# EAGLE board quickdev_v2 (EAGLE 5.07)
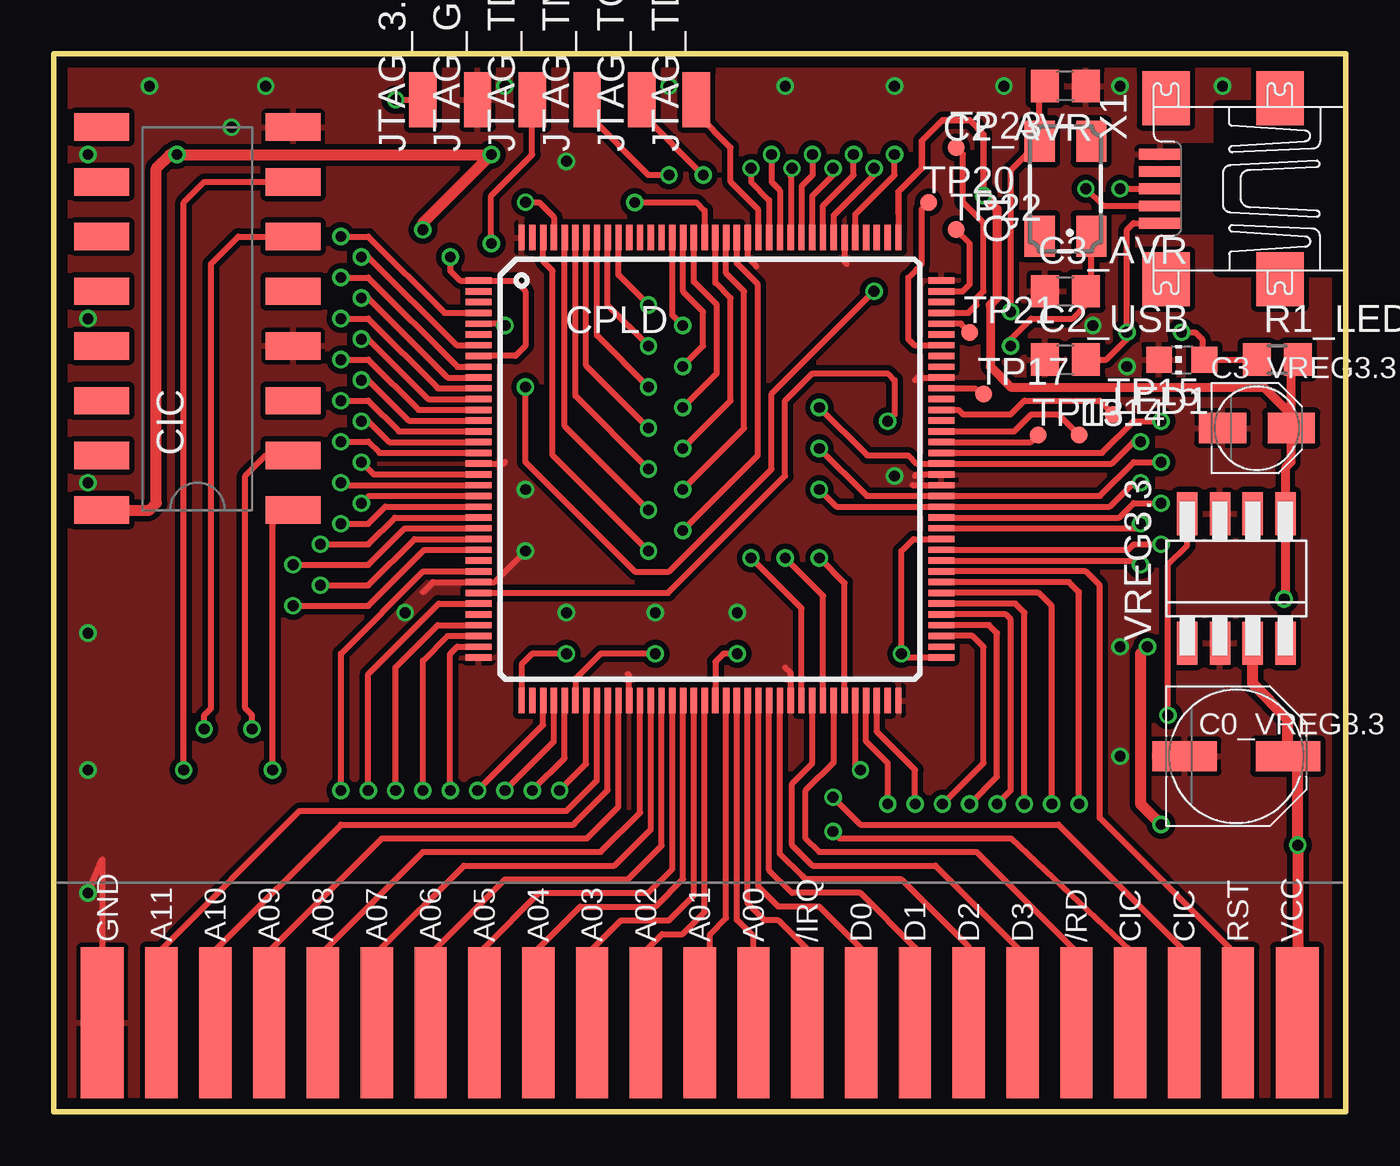
[diagram p0: board, top side]
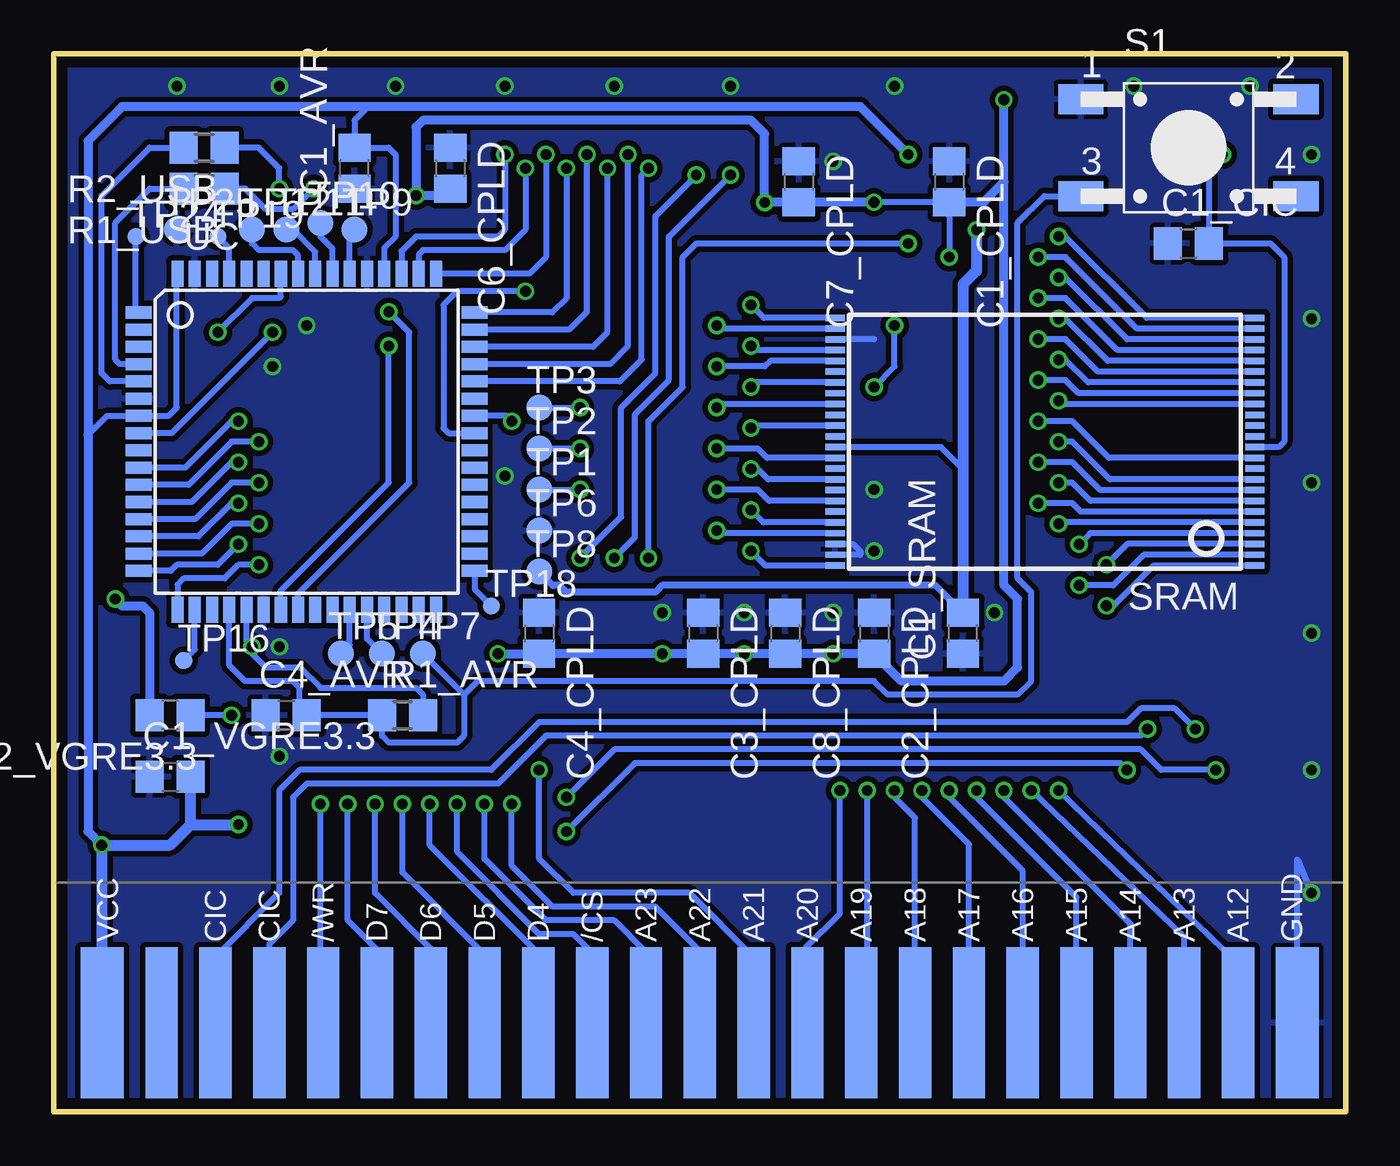
[diagram p1: board, bottom side, seen from below]

Size 60.01 x 49.12 mm. Coordinates in mm from the lower left corner, seen from the top.
Outline: 0,0 0,49.12 60.01,49.12 60.01,0 0,0
Copper layers (1*16): Top 0.035mm / dielectric 1.5mm / Bottom 0.035mm
Design rules "PCB-POOL *": minimum track width 0.2mm, minimum drill 0.3mm, track to track 0.2mm, track to pad 0.2mm, pad to pad 0.2mm, via to via 0.2mm, smd to smd 0.2mm, copper to edge 20mil, drill to drill 8mil, minimum pad ring 8mil, minimum via ring 6mil, stop-mask expansion 3mil, vias tented up to drill 99mil, thermal gap 8mil

## Footprints (pad centres in the part's own frame; a part is rotated, then mirrored left to right if it is on the bottom)
PANASONIC_D = smd 3 x 1.4: + 2.4,0; - -2.4,0
C0805 = smd 1.3 x 1.5: 1 -0.95,0; 2 0.95,0
PANASONIC_B = smd 2.2 x 1.4: + 1.6,0; - -1.6,0
IC-PACKAGE_DIL16_SMD = smd 1.27 x 2.54: 1 -8.89,-4.445; 2 -6.35,-4.445; 3 -3.81,-4.445; 4 -1.27,-4.445; 5 1.27,-4.445; 6 3.81,-4.445; 7 6.35,-4.445; 8 8.89,-4.445; 9 8.89,4.445; 10 6.35,4.445; 11 3.81,4.445; 12 1.27,4.445; 13 -1.27,4.445; 14 -3.81,4.445; 15 -6.35,4.445; 16 -8.89,4.445
TQ144 = smd 1.2 x 0.295: 1 -10.75,8.75; 2 -10.75,8.25; 3 -10.75,7.75; 4 -10.75,7.25; 5 -10.75,6.75; 6 -10.75,6.25; 7 -10.75,5.75; 8 -10.75,5.25; 9 -10.75,4.75; 10 -10.75,4.25; 11 -10.75,3.75; 12 -10.75,3.25; 13 -10.75,2.75; 14 -10.75,2.25; 15 -10.75,1.75; 16 -10.75,1.25; 17 -10.75,0.75; 18 -10.75,0.25; 19 -10.75,-0.25; 20 -10.75,-0.75; 21 -10.75,-1.25; 22 -10.75,-1.75; 23 -10.75,-2.25; 24 -10.75,-2.75; 25 -10.75,-3.25; 26 -10.75,-3.75; 27 -10.75,-4.25; 28 -10.75,-4.75; 29 -10.75,-5.25; 30 -10.75,-5.75; 31 -10.75,-6.25; 32 -10.75,-6.75; 33 -10.75,-7.25; 34 -10.75,-7.75; 35 -10.75,-8.25; 36 -10.75,-8.75; 73 10.75,-8.75; 74 10.75,-8.25; 75 10.75,-7.75; 76 10.75,-7.25; 77 10.75,-6.75; 78 10.75,-6.25; 79 10.75,-5.75; 80 10.75,-5.25; 81 10.75,-4.75; 82 10.75,-4.25; 83 10.75,-3.75; 84 10.75,-3.25; 85 10.75,-2.75; 86 10.75,-2.25; 87 10.75,-1.75; 88 10.75,-1.25; 89 10.75,-0.75; 90 10.75,-0.25; 91 10.75,0.25; 92 10.75,0.75; 93 10.75,1.25; 94 10.75,1.75; 95 10.75,2.25; 96 10.75,2.75; 97 10.75,3.25; 98 10.75,3.75; 99 10.75,4.25; 100 10.75,4.75; 101 10.75,5.25; 102 10.75,5.75; 103 10.75,6.25; 104 10.75,6.75; 105 10.75,7.25; 106 10.75,7.75; 107 10.75,8.25; 108 10.75,8.75 | smd 0.295 x 1.2: 37 -8.75,-10.75; 38 -8.25,-10.75; 39 -7.75,-10.75; 40 -7.25,-10.75; 41 -6.75,-10.75; 42 -6.25,-10.75; 43 -5.75,-10.75; 44 -5.25,-10.75; 45 -4.75,-10.75; 46 -4.25,-10.75; 47 -3.75,-10.75; 48 -3.25,-10.75; 49 -2.75,-10.75; 50 -2.25,-10.75; 51 -1.75,-10.75; 52 -1.25,-10.75; 53 -0.75,-10.75; 54 -0.25,-10.75; 55 0.25,-10.75; 56 0.75,-10.75; 57 1.25,-10.75; 58 1.75,-10.75; 59 2.25,-10.75; 60 2.75,-10.75; 61 3.25,-10.75; 62 3.75,-10.75; 63 4.25,-10.75; 64 4.75,-10.75; 65 5.25,-10.75; 66 5.75,-10.75; 67 6.25,-10.75; 68 6.75,-10.75; 69 7.25,-10.75; 70 7.75,-10.75; 71 8.25,-10.75; 72 8.75,-10.75; 109 8.75,10.75; 110 8.25,10.75; 111 7.75,10.75; 112 7.25,10.75; 113 6.75,10.75; 114 6.25,10.75; 115 5.75,10.75; 116 5.25,10.75; 117 4.75,10.75; 118 4.25,10.75; 119 3.75,10.75; 120 3.25,10.75; 121 2.75,10.75; 122 2.25,10.75; 123 1.75,10.75; 124 1.25,10.75; 125 0.75,10.75; 126 0.25,10.75; 127 -0.25,10.75; 128 -0.75,10.75; 129 -1.25,10.75; 130 -1.75,10.75; 131 -2.25,10.75; 132 -2.75,10.75; 133 -3.25,10.75; 134 -3.75,10.75; 135 -4.25,10.75; 136 -4.75,10.75; 137 -5.25,10.75; 138 -5.75,10.75; 139 -6.25,10.75; 140 -6.75,10.75; 141 -7.25,10.75; 142 -7.75,10.75; 143 -8.25,10.75; 144 -8.75,10.75
SMD1,27-2,54 = smd 1.27 x 2.54: 1 0,0
CHIP-LED0805 = smd 1.2 x 1.2: A 0,-1.05; C 0,1.05
CTS406 = smd 1.9 x 1.4: 1 -2.2,-1.2; 2 2.2,-1.2; 3 2.2,1.2; 4 -2.2,1.2
R0805 = smd 1.3 x 1.5: 1 -0.95,0; 2 0.95,0
TASTER-9314_SMD = smd 2.1 x 1.4: 1 -5,2.25; 2 5,2.25; 3 -5,-2.25; 4 5,-2.25
TSOP48 = smd 0.9 x 0.3: 1 -9.75,5.75; 2 -9.75,5.25; 3 -9.75,4.75; 4 -9.75,4.25; 5 -9.75,3.75; 6 -9.75,3.25; 7 -9.75,2.75; 8 -9.75,2.25; 9 -9.75,1.75; 10 -9.75,1.25; 11 -9.75,0.75; 12 -9.75,0.25; 13 -9.75,-0.25; 14 -9.75,-0.75; 15 -9.75,-1.25; 16 -9.75,-1.75; 17 -9.75,-2.25; 18 -9.75,-2.75; 19 -9.75,-3.25; 20 -9.75,-3.75; 21 -9.75,-4.25; 22 -9.75,-4.75; 23 -9.75,-5.25; 24 -9.75,-5.75; 25 9.75,-5.75; 26 9.75,-5.25; 27 9.75,-4.75; 28 9.75,-4.25; 29 9.75,-3.75; 30 9.75,-3.25; 31 9.75,-2.75; 32 9.75,-2.25; 33 9.75,-1.75; 34 9.75,-1.25; 35 9.75,-0.75; 36 9.75,-0.25; 37 9.75,0.25; 38 9.75,0.75; 39 9.75,1.25; 40 9.75,1.75; 41 9.75,2.25; 42 9.75,2.75; 43 9.75,3.25; 44 9.75,3.75; 45 9.75,4.25; 46 9.75,4.75; 47 9.75,5.25; 48 9.75,5.75
TP12R = smd 1.2 x 1.2: TP 0,0
TP08R = smd 0.8 x 0.8: TP 0,0
SNES_CON = smd 2 x 7: 5 2.25,3.5; 27 57.75,3.5 | smd 1.5 x 7: 6 5,3.5; 7 7.5,3.5; 8 10,3.5; 9 12.5,3.5; 10 15,3.5; 11 17.5,3.5; 12 20,3.5; 13 22.5,3.5; 14 25,3.5; 15 27.5,3.5; 16 30,3.5; 17 32.5,3.5; 18 35,3.5; 19 37.5,3.5; 20 40,3.5; 21 42.5,3.5; 22 45,3.5; 23 47.5,3.5; 24 50,3.5; 25 52.5,3.5; 26 55,3.5 | smd 2 x 7 bottom: 36 2.25,3.5; 58 57.75,3.5 | smd 1.5 x 7 bottom: 37 5,3.5; 38 7.5,3.5; 39 10,3.5; 40 12.5,3.5; 41 15,3.5; 42 17.5,3.5; 43 20,3.5; 44 22.5,3.5; 45 25,3.5; 46 27.5,3.5; 47 30,3.5; 48 32.5,3.5; 49 35,3.5; 50 37.5,3.5; 51 40,3.5; 52 42.5,3.5; 53 45,3.5; 54 47.5,3.5; 55 50,3.5; 56 52.5,3.5; 57 55,3.5
TQFP64 = smd 1.194 x 0.559: 1 -7.8,6; 2 -7.8,5.2; 3 -7.8,4.4; 4 -7.8,3.6; 5 -7.8,2.8; 6 -7.8,2; 7 -7.8,1.2; 8 -7.8,0.4; 9 -7.8,-0.4; 10 -7.8,-1.2; 11 -7.8,-2; 12 -7.8,-2.8; 13 -7.8,-3.6; 14 -7.8,-4.4; 15 -7.8,-5.2; 16 -7.8,-6; 33 7.8,-6; 34 7.8,-5.2; 35 7.8,-4.4; 36 7.8,-3.6; 37 7.8,-2.8; 38 7.8,-2; 39 7.8,-1.2; 40 7.8,-0.4; 41 7.8,0.4; 42 7.8,1.2; 43 7.8,2; 44 7.8,2.8; 45 7.8,3.6; 46 7.8,4.4; 47 7.8,5.2; 48 7.8,6 | smd 0.559 x 1.194: 17 -6,-7.8; 18 -5.2,-7.8; 19 -4.4,-7.8; 20 -3.6,-7.8; 21 -2.8,-7.8; 22 -2,-7.8; 23 -1.2,-7.8; 24 -0.4,-7.8; 25 0.4,-7.8; 26 1.2,-7.8; 27 2,-7.8; 28 2.8,-7.8; 29 3.6,-7.8; 30 4.4,-7.8; 31 5.2,-7.8; 32 6,-7.8; 49 6,7.8; 50 5.2,7.8; 51 4.4,7.8; 52 3.6,7.8; 53 2.8,7.8; 54 2,7.8; 55 1.2,7.8; 56 0.4,7.8; 57 -0.4,7.8; 58 -1.2,7.8; 59 -2,7.8; 60 -2.8,7.8; 61 -3.6,7.8; 62 -4.4,7.8; 63 -5.2,7.8; 64 -6,7.8
SM8 = smd 0.95 x 2: 1 -2.28,-3; 2 -0.76,-3; 3 0.76,-3; 4 2.28,-3; 5 2.28,3; 6 0.76,3; 7 -0.76,3; 8 -2.28,3
UX60A-MB-5ST = smd 2 x 0.5: 1 2.25,1.6; 2 2.25,0.8; 3 2.25,0; 4 2.25,-0.8; 5 2.25,-1.6 | smd 2.2 x 2.5: M1 -3.3,-4.2; M2 -3.3,4.2; M3 2,4.2; M4 2,-4.2

## Placement (x,y rotation side)
C0_VREG3.3  VF 100/16 K-D  [PANASONIC_D]  54.93,16.51 0 top
C1_AVR  X7R-G0805 10N  [C0805]  46.04,43.81 90 bottom
C1_CIC  X7R-G0805 10N  [C0805]  7.3,40.32 0 bottom
C1_CPLD  X7R-G0805 10N  [C0805]  18.41,43.18 270 bottom
C1_SRAM  X7R-G0805 10N  [C0805]  17.78,22.23 90 bottom
C1_VGRE3.3  X7R-G0805 100N  [C0805]  54.61,15.56 0 bottom
C2_AVR  NPO-G0805 15P  [C0805]  46.99,47.62 180 top
C2_CPLD  X7R-G0805 10N  [C0805]  21.91,22.23 270 bottom
C2_USB  X5R-G0805 10/16  [C0805]  46.99,34.92 0 top
C2_VGRE3.3  NPO-G0805 10P  [C0805]  54.61,18.41 180 bottom
C3_AVR  NPO-G0805 15P  [C0805]  46.99,38.1 0 top
C3_CPLD  X7R-G0805 10N  [C0805]  29.84,22.23 270 bottom
C3_VREG3.3  VF 1,0/50 C-B  [PANASONIC_B]  55.88,31.75 0 top
C4_AVR  X7R-G0805 47N  [C0805]  49.21,18.41 0 bottom
C4_CPLD  X7R-G0805 10N  [C0805]  37.47,22.23 270 bottom
C6_CPLD  X7R-G0805 10N  [C0805]  41.59,43.81 270 bottom
C7_CPLD  X7R-G0805 10N  [C0805]  25.4,43.18 270 bottom
C8_CPLD  X7R-G0805 10N  [C0805]  26.04,22.23 270 bottom
CIC  DIL16_SMD  [IC-PACKAGE_DIL16_SMD]  6.67,36.83 90 top
CPLD  XC95144XL  [TQ144]  30.48,29.84 0 top
JTAG_3.3  [SMD1,27-2,54]  17.14,46.99 0 top
JTAG_GND  [SMD1,27-2,54]  19.68,46.99 0 top
JTAG_TCK  [SMD1,27-2,54]  27.3,46.99 0 top
JTAG_TDI  [SMD1,27-2,54]  22.23,46.99 0 top
JTAG_TDO  [SMD1,27-2,54]  29.84,46.99 0 top
JTAG_TMS  [SMD1,27-2,54]  24.77,46.99 0 top
LED1  [CHIP-LED0805]  52.39,34.92 90 top
Q1  16,000000-MJ  [CTS406]  46.99,42.86 90 top
R1_AVR  22  [R0805]  43.81,18.41 0 bottom
R1_LED  1k6  [R0805]  56.83,34.92 0 top
R1_USB  22  [R0805]  53.02,42.86 180 bottom
R2_USB  22  [R0805]  53.02,44.77 180 bottom
S1  [TASTER-9314_SMD]  7.3,44.77 0 bottom
SRAM  CY62167E  [TSOP48]  13.97,31.11 180 bottom
TP1  PTR1TP12R  [TP12R]  37.47,28.89 0 bottom
TP2  PTR1TP12R  [TP12R]  37.47,30.8 0 bottom
TP3  PTR1TP12R  [TP12R]  37.47,32.7 0 bottom
TP4  PTR1TP12R  [TP12R]  44.77,21.27 0 bottom
TP5  PTR1TP12R  [TP12R]  46.67,21.27 0 bottom
TP6  PTR1TP12R  [TP12R]  37.47,26.99 0 bottom
TP7  PTR1TP12R  [TP12R]  42.86,21.27 0 bottom
TP8  PTR1TP12R  [TP12R]  37.47,25.08 0 bottom
TP9  PTR1TP12R  [TP12R]  46.04,40.96 0 bottom
TP10  PTR1TP12R  [TP12R]  47.62,41.27 0 bottom
TP11  PTR1TP12R  [TP12R]  49.21,40.96 0 bottom
TP12  PTR1TP12R  [TP12R]  50.8,40.96 0 bottom
TP13  PTR1TP08R  [TP08R]  45.72,31.43 0 top
TP14  PTR1TP08R  [TP08R]  47.62,31.43 0 top
TP15  PTR1TP08R  [TP08R]  49.21,32.38 0 top
TP16  PTR1TP08R  [TP08R]  53.98,20.95 0 bottom
TP17  PTR1TP08R  [TP08R]  43.18,33.34 0 top
TP18  PTR1TP08R  [TP08R]  39.69,23.5 0 bottom
TP19  PTR1TP08R  [TP08R]  52.39,40.64 0 bottom
TP20  PTR1TP08R  [TP08R]  40.64,42.23 0 top
TP21  PTR1TP08R  [TP08R]  42.55,36.2 0 top
TP22  PTR1TP08R  [TP08R]  41.91,40.96 0 top
TP23  PTR1TP08R  [TP08R]  41.91,44.77 0 top
TP24  PTR1TP08R  [TP08R]  56.2,40.64 0 bottom
TP25  PTR1TP12R  [TP12R]  54.29,40.96 0 bottom
U$2  SNES_CON_FRONT  [SNES_CON]  0,0.64 0 top
UC  AT90USB1287-AU  [TQFP64]  48.26,31.11 0 bottom
VREG3.3  ZLDO 330 T8TA  [SM8]  54.93,24.77 0 top
X1  MINI-USB-UX60A-MB-5ST  [UX60A-MB-5ST]  53.66,42.86 180 top

## Library data of the parts
C0_VREG3.3 C1_AVR C1_CIC C1_CPLD C1_SRAM C1_VGRE3.3 C2_AVR C2_CPLD C2_USB C2_VGRE3.3 C3_AVR C3_CPLD C3_VREG3.3 C4_AVR C4_CPLD C6_CPLD C7_CPLD C8_CPLD R1_AVR R1_LED R1_USB R2_USB = rcl
CIC = snesram
CPLD = quickdev_v2
JTAG_3.3 JTAG_GND JTAG_TCK JTAG_TDI JTAG_TDO JTAG_TMS = wirepad
LED1 = led
Q1 = crystal
S1 = Ergaenzung
SRAM = cy62167
TP1-TP25 = testpad
U$2 = snes_con
UC = at90usb
VREG3.3 = 1_USER
X1 = con-hirose

## Nets
/CE1: CPLD.130 SRAM.26
/CS: CPLD.75 U$2.49
/IRQ: CPLD.58 U$2.18
/OE: CPLD.136 SRAM.28
/RD: CPLD.66 U$2.23
/WE: CPLD.16 SRAM.11
/WR: CPLD.80 U$2.54
A00: CPLD.57 U$2.17
A01: CPLD.56 U$2.16
A02: CPLD.54 U$2.15
A03: CPLD.53 U$2.14
A04: CPLD.52 U$2.13
A05: CPLD.51 U$2.12
A06: CPLD.50 U$2.11
A07: CPLD.49 U$2.10
A08: CPLD.48 U$2.9
A09: CPLD.46 U$2.8
A10: CPLD.45 U$2.7
A11: CPLD.44 U$2.6
A12: CPLD.28 U$2.37
A13: CPLD.31 U$2.38
A14: CPLD.33 U$2.39
A15: CPLD.34 U$2.40
A16: CPLD.35 U$2.41
A17: CPLD.39 U$2.42
A18: CPLD.40 U$2.43
A19: CPLD.41 U$2.44
A20: CPLD.43 U$2.45
A21: CPLD.68 U$2.46
A22: CPLD.69 U$2.47
A23: CPLD.70 U$2.48
AVR0: CPLD.92 UC.10
AVR1: CPLD.91 TP3.TP UC.11
AVR2: CPLD.88 TP2.TP UC.12
AVR3: CPLD.87 TP1.TP UC.13
AVR4: CPLD.86 UC.14
AVR5: CPLD.85 UC.15
AVR6: CPLD.83 UC.16
AVR7: CPLD.82 UC.17
AVR8: CPLD.113 UC.51
AVR9: CPLD.115 UC.50
AVR10: CPLD.116 UC.49
AVR11: CPLD.117 UC.48
AVR12: CPLD.118 UC.47
AVR13: CPLD.119 UC.46
AVR14: CPLD.120 UC.45
AVR15: CPLD.121 UC.44
CICIN6: CIC.6 U$2.56
CICIN7: CIC.7 U$2.25
CICOUT1: CIC.1 U$2.24
CICOUT2: CIC.2 U$2.55
CLK: CPLD.30 UC.42
D0: CPLD.59 U$2.19
D1: CPLD.60 U$2.20
D2: CPLD.61 U$2.21
D3: CPLD.64 U$2.22
D4: CPLD.76 U$2.50
D5: CPLD.77 U$2.51
D6: CPLD.78 U$2.52
D7: CPLD.79 U$2.53
GND: C0_VREG3.3.- C1_AVR.1 C1_CIC.1 C1_CPLD.1 C1_SRAM.1 C1_VGRE3.3.1 C2_AVR.1 C2_CPLD.1 C2_USB.1 C3_AVR.1 C3_CPLD.1 C3_VREG3.3.- C4_AVR.1 C4_CPLD.1 C6_CPLD.1 C7_CPLD.1 C8_CPLD.1 CIC.4 CIC.8 CPLD.18 CPLD.29 CPLD.36 CPLD.47 CPLD.62 CPLD.72 CPLD.89 CPLD.90 CPLD.99 CPLD.108 CPLD.114 CPLD.123 CPLD.144 JTAG_GND.1 LED1.C S1.1 SRAM.27 SRAM.46 SRAM.47 TP6.TP TP25.TP U$2.5 U$2.36 UC.6 UC.22 UC.53 UC.63 VREG3.3.2 VREG3.3.7 X1.5
IO0: CPLD.129 SRAM.29
IO1: CPLD.137 SRAM.31
IO2: CPLD.128 SRAM.33
IO3: CPLD.138 SRAM.35
IO4: CPLD.126 SRAM.38
IO5: CPLD.139 SRAM.40
IO6: CPLD.125 SRAM.42
IO7: CPLD.140 SRAM.44
N$1: R1_USB.1 X1.2
N$2: C2_VGRE3.3.1 VREG3.3.8
N$3: CPLD.122 JTAG_TDO.1
N$4: CPLD.63 JTAG_TDI.1
N$5: CPLD.65 JTAG_TMS.1
N$6: CPLD.67 JTAG_TCK.1
N$7: C3_AVR.2 Q1.1 UC.23
N$8: C2_USB.2 UC.8 X1.1
N$9: C2_AVR.2 Q1.3 UC.24
N$10: R2_USB.1 X1.3
N$11: R2_USB.2 UC.5
N$12: R1_USB.2 UC.4
N$13: C4_AVR.2 R1_AVR.1 S1.3 TP7.TP UC.20
N$14: TP4.TP UC.28
N$15: TP5.TP UC.27
N$16: LED1.A R1_LED.1 UC.58
N$17: TP9.TP UC.54
N$18: TP10.TP UC.55
N$19: TP11.TP UC.56
N$20: TP12.TP UC.57
N$21: TP16.TP UC.18
N$22: TP18.TP UC.33
N$23: CPLD.98 TP17.TP
N$24: TP19.TP UC.61
N$25: CPLD.96 TP15.TP
N$26: CPLD.94 TP14.TP
N$27: CPLD.93 TP13.TP
N$28: CPLD.105 TP23.TP
N$29: CPLD.107 TP22.TP
N$30: CPLD.104 TP21.TP
N$31: CPLD.102 TP20.TP
N$32: TP24.TP UC.1
RST: CPLD.81 U$2.26
SA0: CPLD.135 SRAM.25
SA1: CPLD.4 SRAM.24
SA2: CPLD.7 SRAM.23
SA3: CPLD.9 SRAM.22
SA4: CPLD.10 SRAM.21
SA5: CPLD.11 SRAM.20
SA6: CPLD.12 SRAM.19
SA7: CPLD.13 SRAM.18
SA8: CPLD.19 SRAM.8
SA9: CPLD.20 SRAM.7
SA10: CPLD.21 SRAM.6
SA11: CPLD.22 SRAM.5
SA12: CPLD.23 SRAM.4
SA13: CPLD.24 SRAM.3
SA14: CPLD.25 SRAM.2
SA15: CPLD.26 SRAM.1
SA16: CPLD.142 SRAM.48
SA17: CPLD.14 SRAM.17
SA18: CPLD.15 SRAM.16
SA19: CPLD.17 SRAM.9
SA20: CPLD.124 SRAM.45
TRISTATE: CPLD.5 UC.41
UVCC: UC.3
VCC: C0_VREG3.3.+ C1_AVR.2 C1_CIC.2 C1_SRAM.2 C1_VGRE3.3.2 CIC.16 R1_AVR.2 SRAM.12 SRAM.37 TP8.TP U$2.27 U$2.58 UC.7 UC.21 UC.52 UC.64 VREG3.3.3
VCCINT: C1_CPLD.2 C2_CPLD.2 C2_VGRE3.3.2 C3_CPLD.2 C3_VREG3.3.+ C4_CPLD.2 C6_CPLD.2 C7_CPLD.2 C8_CPLD.2 CPLD.1 CPLD.8 CPLD.37 CPLD.42 CPLD.55 CPLD.73 CPLD.84 CPLD.109 CPLD.127 CPLD.141 JTAG_3.3.1 R1_LED.2 VREG3.3.5

## Tracks (layer width: path | path; a pad name or v marks a point on that pad's centre or on a via)
/CE1  (via drill 0.5)
  Top 0.279: CPLD.130 28.73,36.99 v29.21,36.51
  Bottom 0.279: SRAM.26 29.06,36.37 v29.21,36.51
/CS  (via drill 0.5)
  Top 0.279: CPLD.75 42.67,22.09 43.18,21.59 43.18,16.19 v41.27,14.29
  Bottom 0.279: U$2.49 35,7.38 35.88,8.26 37.47,8.26 41.27,12.06 v41.27,14.29
/IRQ
  Top 0.279: CPLD.58 32.23,9.68 33.02,8.89 33.66,8.89 35,7.54 U$2.18
/OE  (via drill 0.5)
  Top 0.279: CPLD.136 25.73,37.45 v27.62,35.56
  Bottom 0.279: SRAM.28 27.43,35.37 v27.62,35.56
/RD
  Top 0.279: CPLD.66 36.23,16.23 34.92,14.92 34.92,12.7 35.56,12.06 42.86,12.06 47.5,7.43 U$2.23
/WE  (via drill 0.5)
  Top 0.279: CPLD.16 15.58,31.09 14.61,32.07 v14.29,32.07
  Bottom 0.279: SRAM.11 11,30.36 12.7,32.07 v14.29,32.07
/WR  (via drill 0.5)
  Top 0.279: CPLD.80 47.16,24.59 47.62,24.13 v47.62,14.29
  Bottom 0.279: U$2.54 47.62,4.26 v47.62,14.29
A00
  Top 0.279: U$2.17 32.5,8.14 31.73,8.91 CPLD.57
A01
  Top 0.279: CPLD.56 31.23,9.01 30.48,8.26 30.48,4.62 U$2.16
A02
  Top 0.279: CPLD.54 30.23,9.28 29.21,8.26 28.26,8.26 27.5,7.5 U$2.15
A03
  Top 0.279: CPLD.53 29.73,10.04 28.57,8.89 26.35,8.89 25,7.54 U$2.14
A04
  Top 0.279: CPLD.52 29.23,10.81 27.94,9.53 24.45,9.53 22.5,7.58 U$2.13
A05
  Top 0.279: CPLD.51 28.73,11.27 27.62,10.16 22.54,10.16 20,7.62 U$2.12
A06
  Top 0.279: CPLD.50 28.23,12.36 26.67,10.79 20.95,10.79 17.5,7.34 U$2.11
A07
  Top 0.279: CPLD.49 27.73,13.12 26.04,11.43 19.05,11.43 15,7.38 U$2.10
A08
  Top 0.279: CPLD.48 27.23,13.89 25.4,12.06 17.14,12.06 12.5,7.42 U$2.9
A09
  Top 0.279: CPLD.46 26.23,14.16 24.77,12.7 15.24,12.7 10,7.46 U$2.8
A10
  Top 0.279: CPLD.45 25.73,14.94 24.29,13.49 24.13,13.34 13.34,13.34 7.5,7.5 U$2.7
A11
  Top 0.279: CPLD.44 25.23,15.39 23.81,13.97 11.43,13.97 5,7.54 U$2.6
A12  (via drill 0.5)
  Top 0.279: v13.34,14.92 13.34,21.27 17.16,25.09 CPLD.28
  Bottom 0.279: U$2.37 5,6.91 v13.34,14.92
A13  (via drill 0.5)
  Top 0.279: v14.61,14.92 14.61,20.32 17.88,23.59 CPLD.31
  Bottom 0.279: U$2.38 7.5,8.13 v14.61,14.92
A14  (via drill 0.5)
  Top 0.279: v15.88,14.92 15.88,20.64 17.83,22.59 CPLD.33
  Bottom 0.279: U$2.39 10,8.73 15.88,14.61 v15.88,14.92
A15  (via drill 0.5)
  Top 0.279: v17.14,14.92 17.14,20.95 18.29,22.09 CPLD.34
  Bottom 0.279: U$2.40 12.5,9.96 17.14,14.61 v17.14,14.92
A16  (via drill 0.5)
  Top 0.279: CPLD.35 18.74,21.59 18.41,21.27 v18.41,14.92
  Bottom 0.279: U$2.41 15,11.19 18.41,14.61 v18.41,14.92
A17  (via drill 0.5)
  Top 0.279: CPLD.39 22.73,17.97 v19.68,14.92
  Bottom 0.279: U$2.42 17.5,12.42 19.68,14.61 v19.68,14.92
A18  (via drill 0.5)
  Top 0.279: CPLD.40 23.23,17.2 v20.95,14.92
  Bottom 0.279: 20.32,4.46 U$2.43 20,13.65 20.95,14.61 v20.95,14.92
A19  (via drill 0.5)
  Top 0.279: CPLD.41 23.73,16.43 v22.23,14.92
  Bottom 0.279: U$2.44 22.86,4.5 22.23,5.13 v22.23,14.92
A20  (via drill 0.5)
  Top 0.279: CPLD.43 24.73,16.16 v23.5,14.92
  Bottom 0.279: v23.5,14.92 23.5,9.21 25.08,7.62 25.08,4.22 U$2.45
A21  (via drill 0.5)
  Top 0.279: v37.47,15.88 37.23,16.11 CPLD.68
  Bottom 0.279: U$2.46 27.5,7.18 30.48,10.16 35.88,10.16 37.47,11.75 v37.47,15.88
A22  (via drill 0.5)
  Top 0.279: v38.73,14.29 38.73,16.19 37.73,17.2 CPLD.69
  Bottom 0.279: U$2.47 30,7.46 32.07,9.53 36.83,9.53 38.73,11.43 v38.73,14.29
A23  (via drill 0.5)
  Top 0.279: CPLD.70 38.23,17.65 40.01,15.88 v40.01,14.29
  Bottom 0.279: U$2.48 32.5,7.42 33.97,8.89 37.15,8.89 40.01,11.75 v40.01,14.29
AVR0  (via drill 0.5)
  Top 0.279: CPLD.92 48.69,30.59 50.16,32.07 v51.44,32.07
  Bottom 0.279: UC.10 53.91,29.91 51.75,32.07 v51.44,32.07
AVR1  (via drill 0.5)
  Top 0.279: v50.48,31.11 50.16,31.11 49.15,30.09 CPLD.91 40.07,30.09 39.69,30.48 37.78,30.48 v35.56,32.7
  Bottom 0.279: UC.11 53.75,29.11 51.75,31.11 v50.48,31.11 | TP3.TP v35.56,32.7
AVR2  (via drill 0.5)
  Top 0.279: v51.44,30.16 50.16,30.16 48.6,28.59 CPLD.88 37.76,28.59 v35.56,30.8
  Bottom 0.279: UC.12 53.6,28.32 51.75,30.16 v51.44,30.16 | v35.56,30.8 TP2.TP
AVR3  (via drill 0.5)
  Top 0.279: v50.48,29.21 50.16,29.21 49.05,28.09 CPLD.87 36.36,28.09 v35.56,28.89
  Bottom 0.279: UC.13 53.45,27.52 51.75,29.21 v50.48,29.21 | TP1.TP v35.56,28.89
AVR4  (via drill 0.5)
  Top 0.279: CPLD.86 49.5,27.59 50.16,28.26 v51.44,28.26
  Bottom 0.279: UC.14 53.3,26.71 51.75,28.26 v51.44,28.26
AVR5  (via drill 0.5)
  Top 0.279: CPLD.85 50.27,27.09 v50.48,27.3
  Bottom 0.279: UC.15 53.14,25.91 51.75,27.3 v50.48,27.3
AVR6  (via drill 0.5)
  Top 0.279: CPLD.83 49.91,26.09 50.16,26.35 v51.44,26.35
  Bottom 0.279: UC.16 54.58,25.11 54.29,25.4 52.39,25.4 v51.44,26.35
AVR7  (via drill 0.5)
  Top 0.279: CPLD.82 50.29,25.59 arc-90 v50.48,25.4
  Bottom 0.279: UC.17 54.26,24.48 53.98,24.77 52.07,24.77 51.44,25.4 v50.48,25.4
AVR8  (via drill 0.5)
  Top 0.279: CPLD.113 37.23,41.67 39.05,43.5 v39.05,44.45
  Bottom 0.279: UC.51 43.86,39.96 43.18,40.64 39.37,40.64 39.05,40.96 v39.05,44.45
AVR9  (via drill 0.5)
  Top 0.279: CPLD.115 36.23,41.63
  Top 0.305: 36.23,41.63 38.1,43.5 v38.1,43.81
  Bottom 0.279: UC.50 43.06,39.81 42.86,40.01 39.05,40.01 38.1,40.96 v38.1,43.81
AVR10  (via drill 0.5)
  Top 0.279: CPLD.116 35.73,42.08 37.15,43.5 v37.15,44.45
  Bottom 0.279: UC.49 37.92,38.91 37.15,39.69 v37.15,44.45
AVR11  (via drill 0.5)
  Top 0.279: CPLD.117 35.23,42.53 36.2,43.5 v36.2,43.81
  Bottom 0.279: UC.48 36.86,37.12 36.2,37.78 v36.2,43.81
AVR12  (via drill 0.5)
  Top 0.279: CPLD.118 34.73,42.98 35.24,43.5 v35.24,44.45
  Bottom 0.279: UC.47 36.08,36.31 35.24,37.15 v35.24,44.45
AVR13  (via drill 0.5)
  Top 0.279: CPLD.119 34.23,43.44 v34.29,43.81
  Bottom 0.279: UC.46 34.97,35.52 34.29,36.2 v34.29,43.81
AVR14  (via drill 0.5)
  Top 0.279: CPLD.120 33.73,42.79 33.34,43.18 v33.34,44.45
  Bottom 0.279: UC.45 34.18,34.72 33.34,35.56 v33.34,44.45
AVR15  (via drill 0.5)
  Top 0.279: CPLD.121 33.23,42.34 32.38,43.18 v32.38,43.81
  Bottom 0.279: UC.44 33.71,33.91 32.7,34.92 32.7,43.5 v32.38,43.81
CICIN6  (via drill 0.5)
  Top 0.279: v6.99,17.78 6.99,18.41 7.3,18.73 7.3,39.37 8.57,40.64 CIC.6
  Bottom 0.279: U$2.56 52.5,7.19 49.53,10.16 49.53,14.92 48.58,15.88 39.69,15.88 37.47,18.1 10.16,18.1 9.53,18.73 7.94,18.73 v6.99,17.78
CICIN7  (via drill 0.5)
  Top 0.279: v36.2,14.61 37.47,13.34 46.67,13.34 52.5,7.51 U$2.25 | v6.03,15.88 6.03,42.23 6.99,43.18 CIC.7
  Bottom 0.279: v36.2,14.61 33.97,16.83 9.53,16.83 8.57,15.88 v6.03,15.88
CICOUT1  (via drill 0.5)
  Top 0.279: v10.16,15.88 10.16,27.3 10.79,27.94 CIC.1 | U$2.24 50,7.47 44.45,12.7 36.51,12.7 v36.2,13.02
  Bottom 0.279: v36.2,13.02 33.02,16.19 10.48,16.19 v10.16,15.88
CICOUT2  (via drill 0.5)
  Top 0.279: v9.21,17.78 9.21,18.41 8.89,18.73 8.89,29.53 9.84,30.48 CIC.2
  Bottom 0.279: U$2.55 50,7.79 48.9,8.89 48.9,14.61 48.26,15.24 39.37,15.24 37.15,17.46 9.53,17.46 v9.21,17.78
CLK  (via drill 0.5)
  Top 0.279: CPLD.30 28.54,24.09 33.97,29.53 33.97,33.02 35.24,34.29 38.73,34.29 39.05,33.97 39.05,32.38 v38.73,32.07
  Bottom 0.279: v38.73,32.07 38.98,32.31 UC.42
D0
  Top 0.279: CPLD.59 32.73,10.45 33.66,9.53 35.56,9.53 37.5,7.58 U$2.19
D1
  Top 0.279: CPLD.60 33.23,11.22 34.29,10.16 37.47,10.16 40,7.62 U$2.20
D2
  Top 0.279: CPLD.61 33.73,11.99 34.77,10.95 34.92,10.79 39.37,10.79 42.5,7.67 U$2.21
D3
  Top 0.279: CPLD.64 35.23,16.18 34.29,15.24 34.29,12.38 35.24,11.43 40.96,11.43 45,7.39 U$2.22
D4  (via drill 0.5)
  Top 0.279: CPLD.76 43.45,22.59 43.81,22.23 43.81,15.56 v42.55,14.29
  Bottom 0.279: U$2.50 37.5,7.34 42.55,12.38 v42.55,14.29
D5  (via drill 0.5)
  Top 0.279: CPLD.77 44.22,23.09 44.45,22.86 44.45,14.92 v43.81,14.29
  Bottom 0.279: U$2.51 40,7.3 43.81,11.11 v43.81,14.29
D6  (via drill 0.5)
  Top 0.279: CPLD.78 44.67,23.59 45.09,23.18 v45.09,14.29
  Bottom 0.279: U$2.52 42.5,7.58 45.09,10.16 v45.09,14.29
D7  (via drill 0.5)
  Top 0.279: CPLD.79 45.76,24.09 46.35,23.5 v46.35,14.29
  Bottom 0.279: U$2.53 45,7.54 46.35,8.89 v46.35,14.29
GND  (via drill 0.5)
  Top 0.279: U$2.36 2.25,11.72 v1.59,10.16 | 39.89,29.09 CPLD.89 | CPLD.90 40.07,29.59 40.01,29.53 | CPLD.18 20.89,30.09 20.95,30.16 | v21.91,26.04 20.47,24.59 CPLD.29 17.61,24.59 17.14,24.13 | CPLD.47 26.73,20.26 26.67,20.32 | CPLD.62 34.23,20.38 33.97,20.64 | CPLD.114 36.73,39.47 36.83,39.37 | CPLD.99 40.13,34.09 40.01,33.97 | CPLD.123 32.23,39.66 32.64,39.25
  Bottom 0.279: v1.59,10.16 2.25,11.72 U$2.36 | SRAM.47 22.54,25.86 22.54,26.04 22.86,26.35 23.81,26.35 | SRAM.27 21.92,35.87 21.91,35.88
  other vias: 49.53,47.62 54.29,47.62 44.13,47.62 39.05,47.62 33.97,47.62 28.57,47.62 20.95,47.62 9.84,47.62 4.45,47.62 1.59,15.88 1.59,22.23 1.59,29.21 1.59,36.83 1.59,44.45 21.91,28.89 23.81,23.18 27.94,23.18 31.75,23.18 39.05,29.53 23.81,44.13 16.32,23.18 8.26,45.72 49.53,21.59 49.53,16.51 48.26,36.51 49.85,34.61
  pour Top (isolate 0.254): 0,0 0,49.12 60.33,49.12 60.33,0
  pour Bottom (isolate 0.254): 0,0 -0.32,49.12 60.01,49.12 60.01,0
IO0  (via drill 0.5)
  Top 0.279: CPLD.129 29.23,38.08 30.16,37.15 30.16,35.56 v29.21,34.61
  Bottom 0.279: SRAM.29 26.73,34.87 26.99,34.61 v29.21,34.61
IO1  (via drill 0.5)
  Top 0.279: CPLD.137 25.23,36.05 v27.62,33.66
  Bottom 0.279: SRAM.31 27.41,33.87 v27.62,33.66
IO2  (via drill 0.5)
  Top 0.279: CPLD.128 29.73,38.53 30.8,37.47 30.8,34.29 v29.21,32.7
  Bottom 0.279: SRAM.33 29.05,32.87 v29.21,32.7
IO3  (via drill 0.5)
  Top 0.279: CPLD.138 24.73,34.64 v27.62,31.75
  Bottom 0.279: SRAM.35 27.51,31.86 v27.62,31.75
IO4  (via drill 0.5)
  Top 0.279: CPLD.126 30.73,38.48 31.43,37.78 31.43,33.02 v29.21,30.8
  Bottom 0.279: SRAM.38 26.87,30.36 27.3,30.8 v29.21,30.8
IO5  (via drill 0.5)
  Top 0.279: CPLD.139 24.23,33.24 v27.62,29.84
  Bottom 0.279: SRAM.40 26.82,29.36 27.3,29.84 v27.62,29.84
IO6  (via drill 0.5)
  Top 0.279: CPLD.125 31.23,38.94 32.07,38.1 32.07,31.75 v29.21,28.89
  Bottom 0.279: SRAM.42 26.78,28.36 27.3,28.89 v29.21,28.89
IO7  (via drill 0.5)
  Top 0.279: CPLD.140 23.73,31.83 v27.62,27.94
  Bottom 0.279: SRAM.44 27.05,27.36 v27.62,27.94
N$1  (via drill 0.5)
  Top 0.279: X1.2 48.74,42.06 v47.94,42.86
  Bottom 0.279: v47.94,42.86 48.9,41.91 50.16,41.91 51.12,42.86 R1_USB.1
N$2  (via drill 0.5)
  Top 0.279: VREG3.3.8 52.65,26.3 51.75,25.4 v51.75,18.41
  Bottom 0.279: v51.75,18.41 C2_VGRE3.3.1
N$3
  Top 0.279: CPLD.122 32.73,41.88 31.43,43.18 31.43,44.77 29.84,46.35 JTAG_TDO.1
N$4  (via drill 0.5)
  Top 0.279: CPLD.63 34.73,23.37 v32.38,25.72 | v20.32,40.32 20.32,42.55 22.23,44.45 JTAG_TDI.1
  Bottom 0.279: v32.38,25.72 32.38,32.07 30.8,33.66 30.8,39.69 30.16,40.32 v20.32,40.32
N$5  (via drill 0.5)
  Top 0.279: CPLD.65 35.73,23.96 v33.97,25.72 | JTAG_TMS.1 24.77,46.35 27.62,43.5 v28.57,43.5
  Bottom 0.279: v33.97,25.72 33.02,26.67 33.02,32.38 31.43,33.97 31.43,40.64 v28.57,43.5
N$6  (via drill 0.5)
  Top 0.279: CPLD.67 36.73,24.55 v35.56,25.72 | v30.16,43.5 27.3,46.35 JTAG_TCK.1
  Bottom 0.279: v35.56,25.72 33.66,27.62 33.66,32.7 32.07,34.29 32.07,41.59 v30.16,43.5
N$7  (via drill 0.5)
  Top 0.279: Q1.1 48.19,38.35 C3_AVR.2 47.94,37.47 47.3,36.83 45.4,36.83 44.45,35.88 v44.45,35.56
  Bottom 0.279: UC.23 49.46,24.2 44.45,29.21 v44.45,35.56
N$8  (via drill 0.5)
  Top 0.279: C2_USB.2 48.9,34.92 49.85,35.88 v49.85,36.2 49.85,40.96 50.15,41.26 X1.1
  Bottom 0.279: UC.8 54.53,31.52 v49.85,36.2
N$9  (via drill 0.5)
  Top 0.279: C2_AVR.2 45.79,47.38 Q1.3 44.45,43.72 v44.45,37.15
  Bottom 0.279: UC.24 48.66,24.05 43.5,29.21 43.5,36.2 v44.45,37.15
N$10  (via drill 0.5)
  Top 0.279: v49.53,42.86 X1.3
  Bottom 0.279: v49.53,42.86 49.53,43.81 50.48,44.77 R2_USB.1
N$11
  Bottom 0.279: UC.5 57.41,33.91 57.78,34.29 57.78,42.54 55.56,44.77 R2_USB.2
N$12
  Bottom 0.279: UC.4 56.94,34.72 57.15,34.92 57.15,41.27 55.56,42.86 R1_USB.2
N$13
  Bottom 0.279: UC.20 51.86,20.75 51.12,20 48.9,20 48.58,19.68 48.58,18.73 C4_AVR.2 R1_AVR.1 44.77,17.46 44.45,17.14 41.27,17.14 40.96,17.46 40.96,19.37 | 40.96,19.37 TP7.TP | S1.3 14,42.52 15.24,41.27 15.24,24.77 14.61,24.13 14.61,20 15.24,19.37 21.27,19.37 21.91,20 40.32,20 40.96,19.37
N$14
  Bottom 0.279: TP4.TP 45.46,21.96 UC.28
N$15
  Bottom 0.279: TP5.TP 46.26,21.68 UC.27
N$16  (via drill 0.5)
  Top 0.279: R1_LED.1 LED1.A 53.34,35.02 53.34,35.88 53.02,36.2 v52.39,36.2
  Bottom 0.279: UC.58 49.46,37.85 49.53,37.78 50.8,37.78 v52.39,36.2
N$17
  Bottom 0.279: UC.54 46.26,41.05 TP9.TP
N$18
  Bottom 0.279: UC.55 47.06,40.08 47.62,40.64 TP10.TP
N$19
  Bottom 0.279: UC.56 47.86,39.92 48.9,40.96 TP11.TP
N$20
  Bottom 0.279: UC.57 48.66,39.77 48.9,40.01 50.48,40.01 50.8,40.32 TP12.TP
N$21
  Bottom 0.279: UC.18 53.46,21.47 TP16.TP
N$22
  Bottom 0.279: UC.33 40.46,24.27 TP18.TP
N$23
  Top 0.279: CPLD.98 42.8,33.59 TP17.TP
N$24
  Bottom 0.279: UC.61 51.86,40.11 TP19.TP
N$25
  Top 0.279: TP15.TP 48.58,33.02 45.09,33.02 44.45,32.38 42.23,32.38 42.02,32.59 CPLD.96
N$26
  Top 0.279: CPLD.94 44.61,31.59 45.4,32.38 46.67,32.38 TP14.TP
N$27
  Top 0.279: CPLD.93 45.38,31.09 TP13.TP
N$28
  Top 0.279: CPLD.105 42.49,37.09 42.86,37.47 42.86,37.78 43.18,38.1 43.18,41.27 42.23,42.23 42.23,44.45 TP23.TP
N$29
  Top 0.279: CPLD.107 42.22,38.09 42.55,38.42 42.55,40.32 TP22.TP
N$30
  Top 0.279: CPLD.104 42.15,36.59 TP21.TP
N$31
  Top 0.279: CPLD.102 39.97,35.59 39.69,35.88 39.69,38.73 40.32,39.37 40.32,41.91 TP20.TP
N$32
  Bottom 0.279: TP24.TP 56.2,37.25 UC.1
RST
  Top 0.279: CPLD.81 47.93,25.09 48.58,24.45 48.58,13.65 54.61,7.62 54.61,4.53 U$2.26
SA0  (via drill 0.5)
  Top 0.279: CPLD.135 26.23,38.86 v27.62,37.47
  Bottom 0.279: SRAM.25 27.02,36.87 v27.62,37.47
SA1  (via drill 0.5)
  Top 0.279: v13.34,40.64 14.61,40.64 18.15,37.09 CPLD.4
  Bottom 0.279: SRAM.24 9.24,36.87 13.02,40.64 v13.34,40.64
SA2  (via drill 0.5)
  Top 0.279: CPLD.7 18.7,35.59 14.61,39.69 v14.29,39.69
  Bottom 0.279: SRAM.23 9.7,36.37 13.02,39.69 v14.29,39.69
SA3  (via drill 0.5)
  Top 0.279: CPLD.9 18.75,34.59 14.61,38.73 v13.34,38.73
  Bottom 0.279: SRAM.22 10.15,35.87 13.02,38.73 v13.34,38.73
SA4  (via drill 0.5)
  Top 0.279: CPLD.10 18.29,34.09 14.61,37.78 v14.29,37.78
  Bottom 0.279: SRAM.21 10.6,35.37 13.02,37.78 v14.29,37.78
SA5  (via drill 0.5)
  Top 0.279: 19.43,33.59 CPLD.11 17.84,33.59 14.61,36.83 v13.34,36.83
  Bottom 0.279: SRAM.20 11.05,34.87 13.02,36.83 v13.34,36.83
SA6  (via drill 0.5)
  Top 0.279: CPLD.12 17.39,33.09 14.61,35.88 v14.29,35.88
  Bottom 0.279: SRAM.19 11.51,34.37 13.02,35.88 v14.29,35.88
SA7  (via drill 0.5)
  Top 0.279: CPLD.13 16.93,32.59 14.61,34.92 v13.34,34.92
  Bottom 0.279: SRAM.18 11.96,33.87 13.02,34.92 v13.34,34.92
SA8  (via drill 0.5)
  Top 0.279: CPLD.19 14.86,29.59 v14.29,30.16
  Bottom 0.279: SRAM.8 11.4,28.86 12.7,30.16 v14.29,30.16
SA9  (via drill 0.5)
  Top 0.279: CPLD.20 13.45,29.09 v13.34,29.21
  Bottom 0.279: SRAM.7 11.86,28.36 12.7,29.21 v13.34,29.21
SA10  (via drill 0.5)
  Top 0.279: CPLD.21 14.62,28.59 v14.29,28.26
  Bottom 0.279: SRAM.6 12.31,27.86 12.7,28.26 v14.29,28.26
SA11  (via drill 0.5)
  Top 0.279: CPLD.22 15.39,28.09 14.61,27.3 v13.34,27.3
  Bottom 0.279: SRAM.5 13.28,27.36 v13.34,27.3
SA12  (via drill 0.5)
  Top 0.279: CPLD.23 15.85,27.59 14.61,26.35 v12.38,26.35
  Bottom 0.279: SRAM.4 11.87,26.86 v12.38,26.35
SA13  (via drill 0.5)
  Top 0.279: CPLD.24 16.3,27.09 14.61,25.4 v11.11,25.4
  Bottom 0.279: SRAM.3 10.15,26.36 v11.11,25.4
SA14  (via drill 0.5)
  Top 0.279: CPLD.25 16.75,26.59 14.61,24.45 v12.38,24.45
  Bottom 0.279: SRAM.2 9.38,25.86 10.79,24.45 v12.38,24.45
SA15  (via drill 0.5)
  Top 0.279: CPLD.26 17.2,26.09 14.61,23.5 v11.11,23.5
  Bottom 0.279: SRAM.1 8.93,25.36 10.79,23.5 v11.11,23.5
SA16  (via drill 0.5)
  Top 0.279: CPLD.142 22.73,39.5 23.18,39.05 23.18,30.48 v27.62,26.04
  Bottom 0.279: SRAM.48 26.95,25.36 v27.62,26.04
SA17  (via drill 0.5)
  Top 0.279: CPLD.14 16.48,32.09 14.61,33.97 v14.29,33.97
  Bottom 0.279: SRAM.17 12.41,33.37 13.02,33.97 v14.29,33.97
SA18  (via drill 0.5)
  Top 0.279: CPLD.15 16.03,31.59 14.61,33.02 v13.34,33.02
  Bottom 0.279: SRAM.16 13.18,32.87 v13.34,33.02
SA19  (via drill 0.5)
  Top 0.279: CPLD.17 15.12,30.59 14.61,31.11 v13.34,31.11
  Bottom 0.279: SRAM.9 10.95,29.36 12.7,31.11 v13.34,31.11
SA20  (via drill 0.5)
  Top 0.279: CPLD.124 31.73,39.39 32.7,38.42 32.7,30.48 v29.21,26.99
  Bottom 0.279: SRAM.45 29.09,26.86 v29.21,26.99
TRISTATE  (via drill 0.5)
  Top 0.279: CPLD.5 20.87,36.59 v20.95,36.51 | v38.1,38.1 33.34,33.34 33.34,29.84 28.57,25.08 26.99,25.08 21.91,30.16 v21.91,33.66
  Bottom 0.279: v20.95,36.51 20.95,34.61 v21.91,33.66 | v38.1,38.1 41.27,38.1 41.91,37.47 41.91,31.75 41.67,31.52 UC.41
VCC  (via drill 0.5)
  Top 0.279: 57.78,16.05 C0_VREG3.3.+ | 5.4,44.45 v5.71,44.45 | CIC.16 2.54,27.94 | 50.48,21.27 v50.8,21.59
  Top 0.508: 57.78,16.05 v57.78,12.38 57.78,4.17 U$2.58 | VREG3.3.3 55.69,19.88 57.33,18.24 C0_VREG3.3.+ | 5.4,44.45 4.76,43.81 4.76,28.26 4.45,27.94 CIC.16 | v5.71,44.45 v20.32,44.45 17.14,41.27 v17.14,40.96 | v51.44,13.34 50.48,14.29 50.48,21.27
  Bottom 0.279: SRAM.37 18.8,30.86 17.78,29.84 | 57.78,4.17 U$2.58 | UC.64 54.29,38.88 54.29,32.7 54.68,32.31 UC.7 57.54,32.31 58.42,31.43 | C1_SRAM.2 | 45.4,46.67 46.04,46.04 C1_AVR.2 44.45,44.77 44.13,44.45 44.13,40.64 44.66,40.11 UC.52 | R1_AVR.2 42.87,19.37 43.18,19.68 47.62,19.68 48.58,20.64 50.16,20.64 50.8,21.27 v50.8,21.59 51.06,21.85 UC.21 | 53.66,13.33 53.66,13.34 | v5.71,44.45 6.35,43.81 C1_CIC.2 3.49,40.32 2.86,39.69 2.86,31.11 3.11,30.86 SRAM.12
  Bottom 0.33: TP8.TP 36.83,24.45 36.51,24.45 36.2,24.13 32.07,24.13 31.75,24.45 19.05,24.45 C1_SRAM.2
  Bottom 0.406: v20.32,44.45 22.54,46.67 45.4,46.67 56.83,46.67 58.42,45.09 58.42,31.43 58.42,13.02 v57.78,12.38
  Bottom 0.508: C1_VGRE3.3.2 53.66,13.33 54.61,12.38 v57.78,12.38 57.78,4.17 | C1_SRAM.2 17.78,29.84 17.78,38.42 17.14,39.05 v17.14,40.96 | 53.66,13.34 v51.44,13.34
VCCINT  (via drill 0.5)
  Top 0.279: CPLD.8 21.44,35.09 21.91,35.56 21.91,38.1 21.41,38.59 CPLD.1 18.87,38.59 18.41,39.05 v18.41,39.69 | CPLD.141 23.23,41.54 22.54,42.23 v21.91,42.23 | CPLD.127 30.23,41.84 29.84,42.23 28.26,42.23 v26.99,42.23 | 39.23,41.77 CPLD.109 | v23.81,21.27 22.23,21.27 21.73,20.78 CPLD.37 | CPLD.42 24.23,20.1 25.4,21.27 v27.94,21.27 | CPLD.55 30.73,20.89 31.11,21.27 v31.75,21.27 | 57.47,31.74 C3_VREG3.3.+ 57.47,31.76 57.47,32.38 | CPLD.73 39.55,21.09 v39.37,21.27 39.37,26.04 39.93,26.59 CPLD.84 | v15.88,46.99 JTAG_3.3.1 | 57.21,23.87 v57.15,23.81 | 57.48,34.94 R1_LED.2
  Top 0.305: 39.23,41.77 39.23,42.72 40.32,43.81 40.32,45.09 41.27,46.04 42.55,46.04 43.18,45.4 v43.18,42.55
  Top 0.406: 57.47,31.74 57.47,30.16 57.21,29.9 VREG3.3.5 57.21,23.87 | v43.18,42.55 43.81,41.91 43.81,37.78 43.5,37.47 43.5,34.61 44.45,33.66 56.2,33.66 57.47,32.38 | C3_VREG3.3.+ 57.48,34.94
  Bottom 0.279: C4_CPLD.2 38.1,21.27 | C3_CPLD.2 | v27.94,21.27 | v23.81,21.27 | v26.98,42.23 v26.99,42.23 | v43.18,42.55 | 18.41,41.59 v18.41,39.69 | 18.41,41.59 C1_CPLD.2 18.09,42.23 | v39.37,21.27 C4_CPLD.2 | C4_CPLD.2 | C8_CPLD.2 | v21.91,42.23 18.73,42.23 18.41,41.59 | v57.15,23.81 56.83,23.5 | 41.91,42.55 C6_CPLD.2
  Bottom 0.406: C3_CPLD.2 v31.75,21.27 C4_CPLD.2 | v27.94,21.27 C3_CPLD.2 | v23.81,21.27 C2_CPLD.2 20.64,20 15.88,20 15.24,20.64 15.24,23.81 15.88,24.45 15.88,43.18 | v43.18,42.55 43.18,45.72 42.86,46.04 27.62,46.04 26.99,45.41 v26.99,42.23 v26.98,42.23 C7_CPLD.2 v21.91,42.23 | v39.37,21.27 C4_CPLD.2 | v23.81,21.27 C8_CPLD.2 | C8_CPLD.2 v27.94,21.27 | 15.88,43.18 16.83,42.23 18.09,42.23 | 15.88,43.18 v15.88,46.99 | C2_VGRE3.3.2 55.56,23.18 55.88,23.5 56.83,23.5 | v43.18,42.55 41.91,42.55